# Altium PCB ZynQRF.PcbDoc (part 1 of 2)
Units mm, origin at the board's own origin, x right, y up, seen from the top; angles counter-clockwise.
Board outline 152.4 x 101.6 mm, 6 copper layers (Top Layer, Int1 (GND), Int2 (Sign), Int3 (Sign), Int4 (PWR), Bottom Layer), stack 1.551 mm thick; 211 components, 269 nets, 1177 pads, 225 vias.
Unrouted connection lines stored in the file: 758.
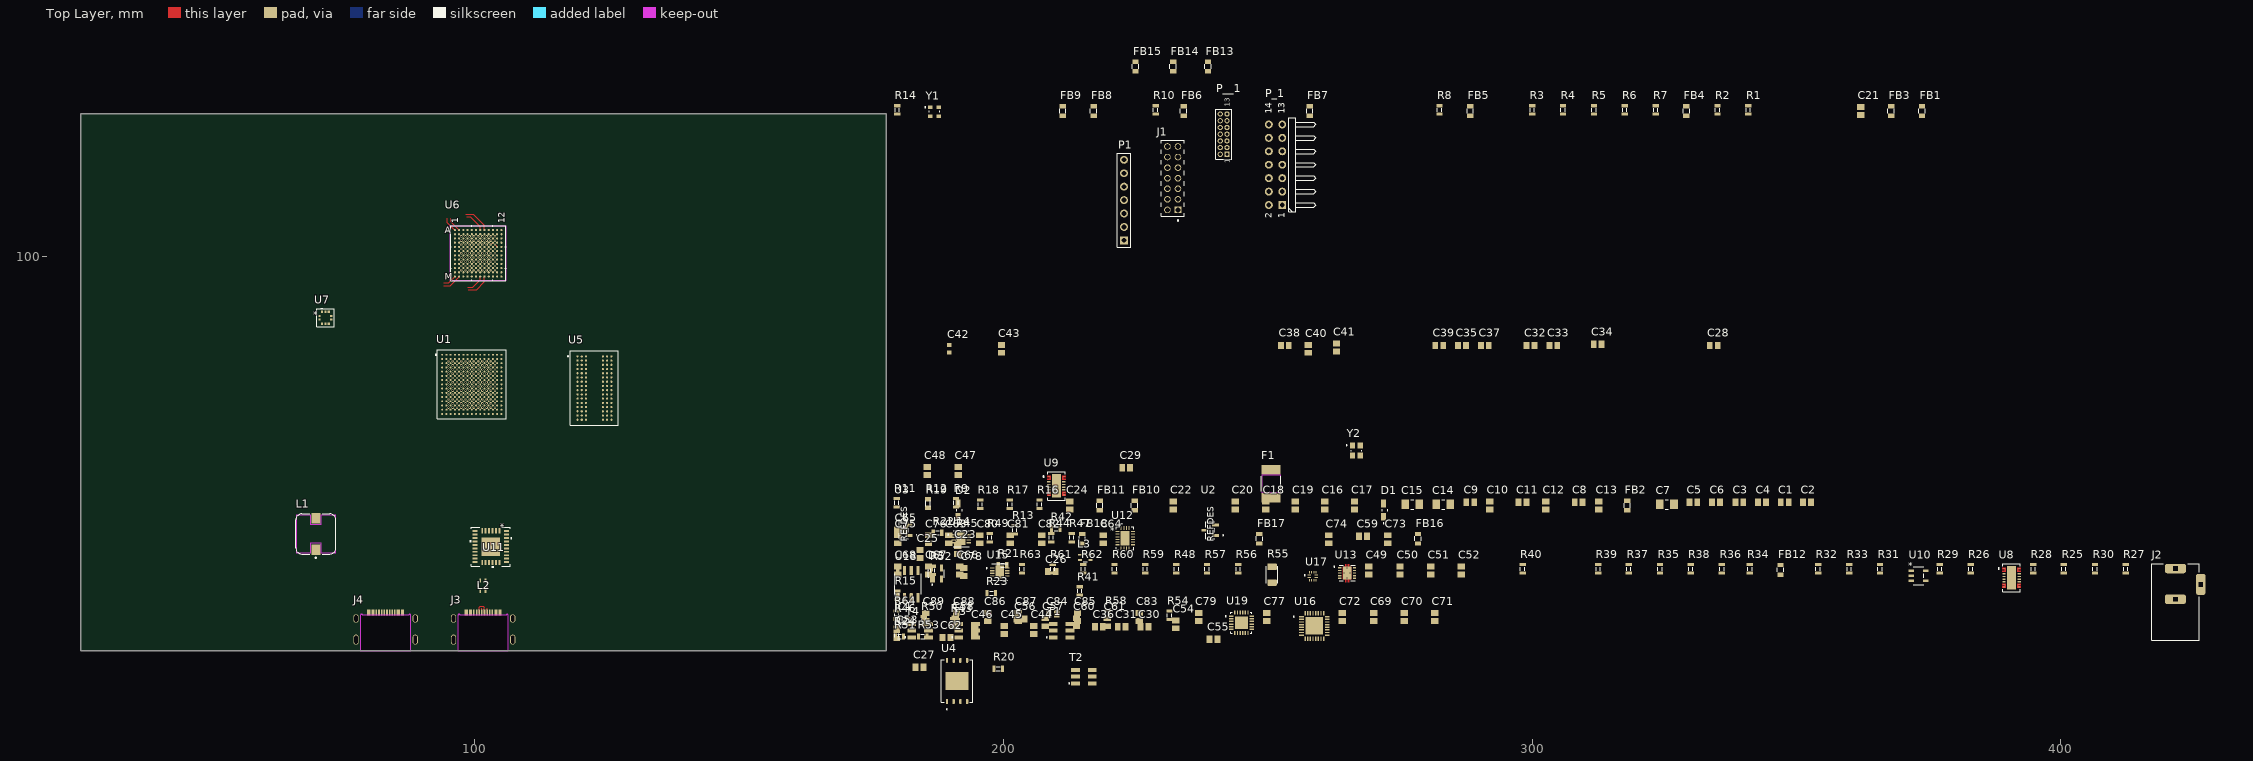
[diagram p0: Top Layer view]
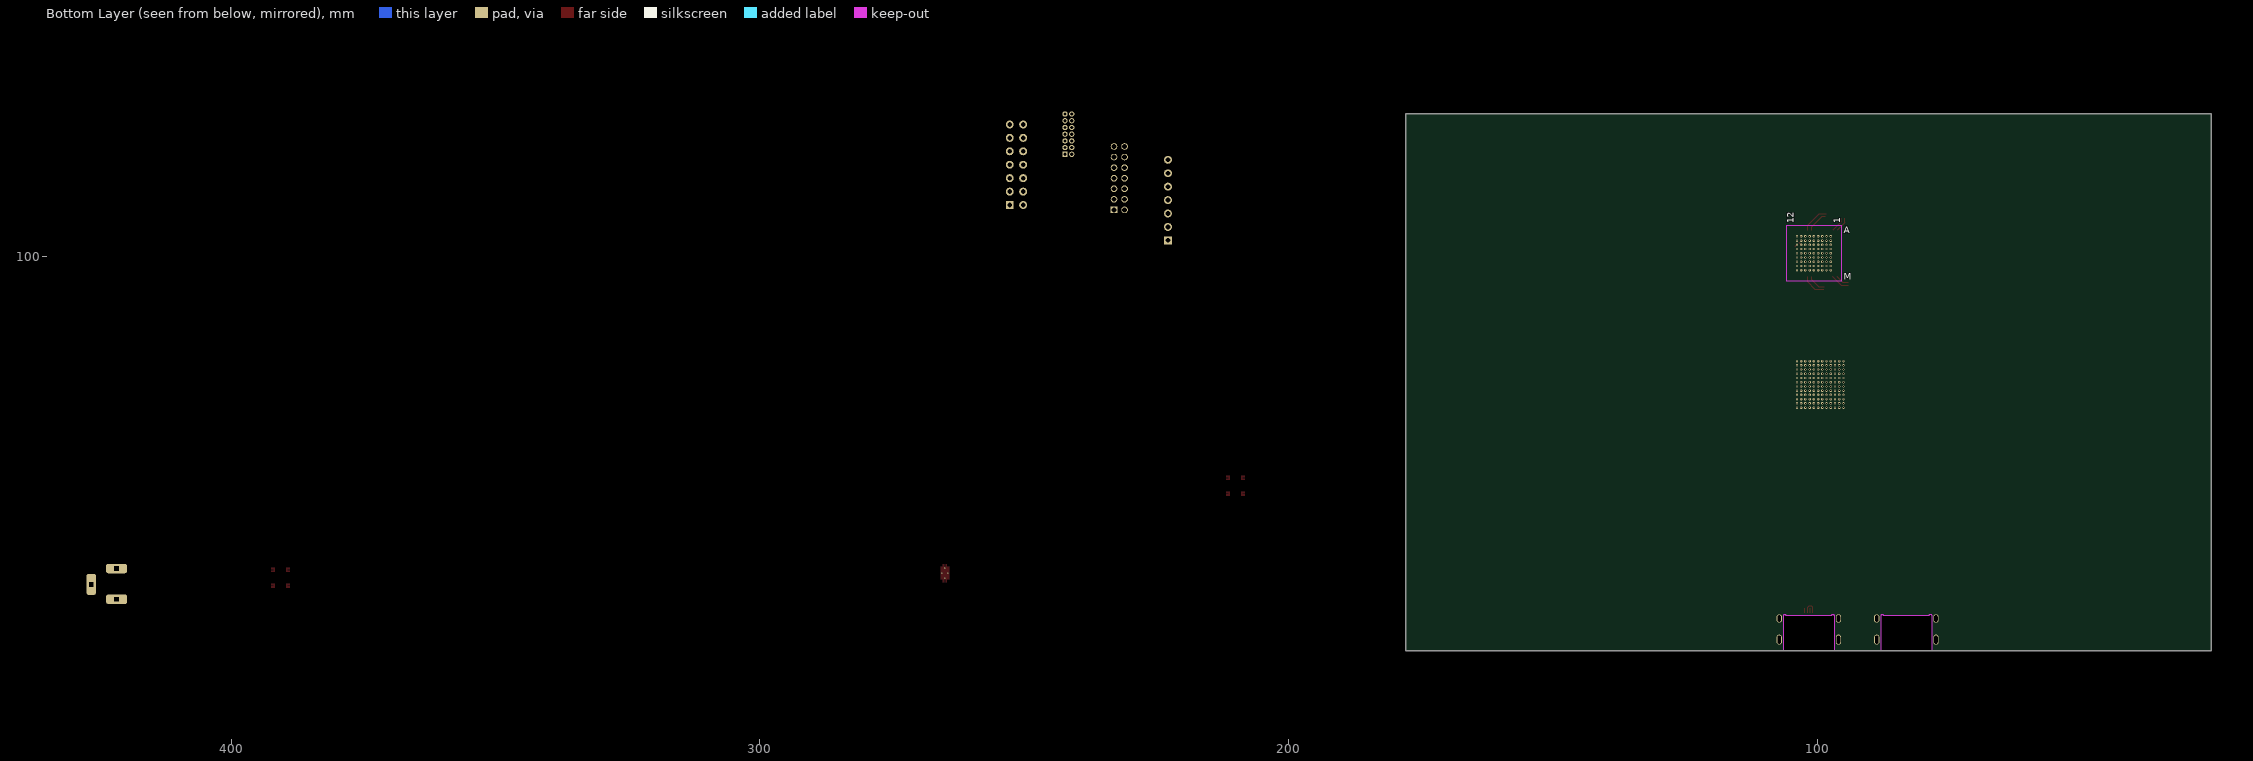
[diagram p1: Bottom Layer view, seen from below]
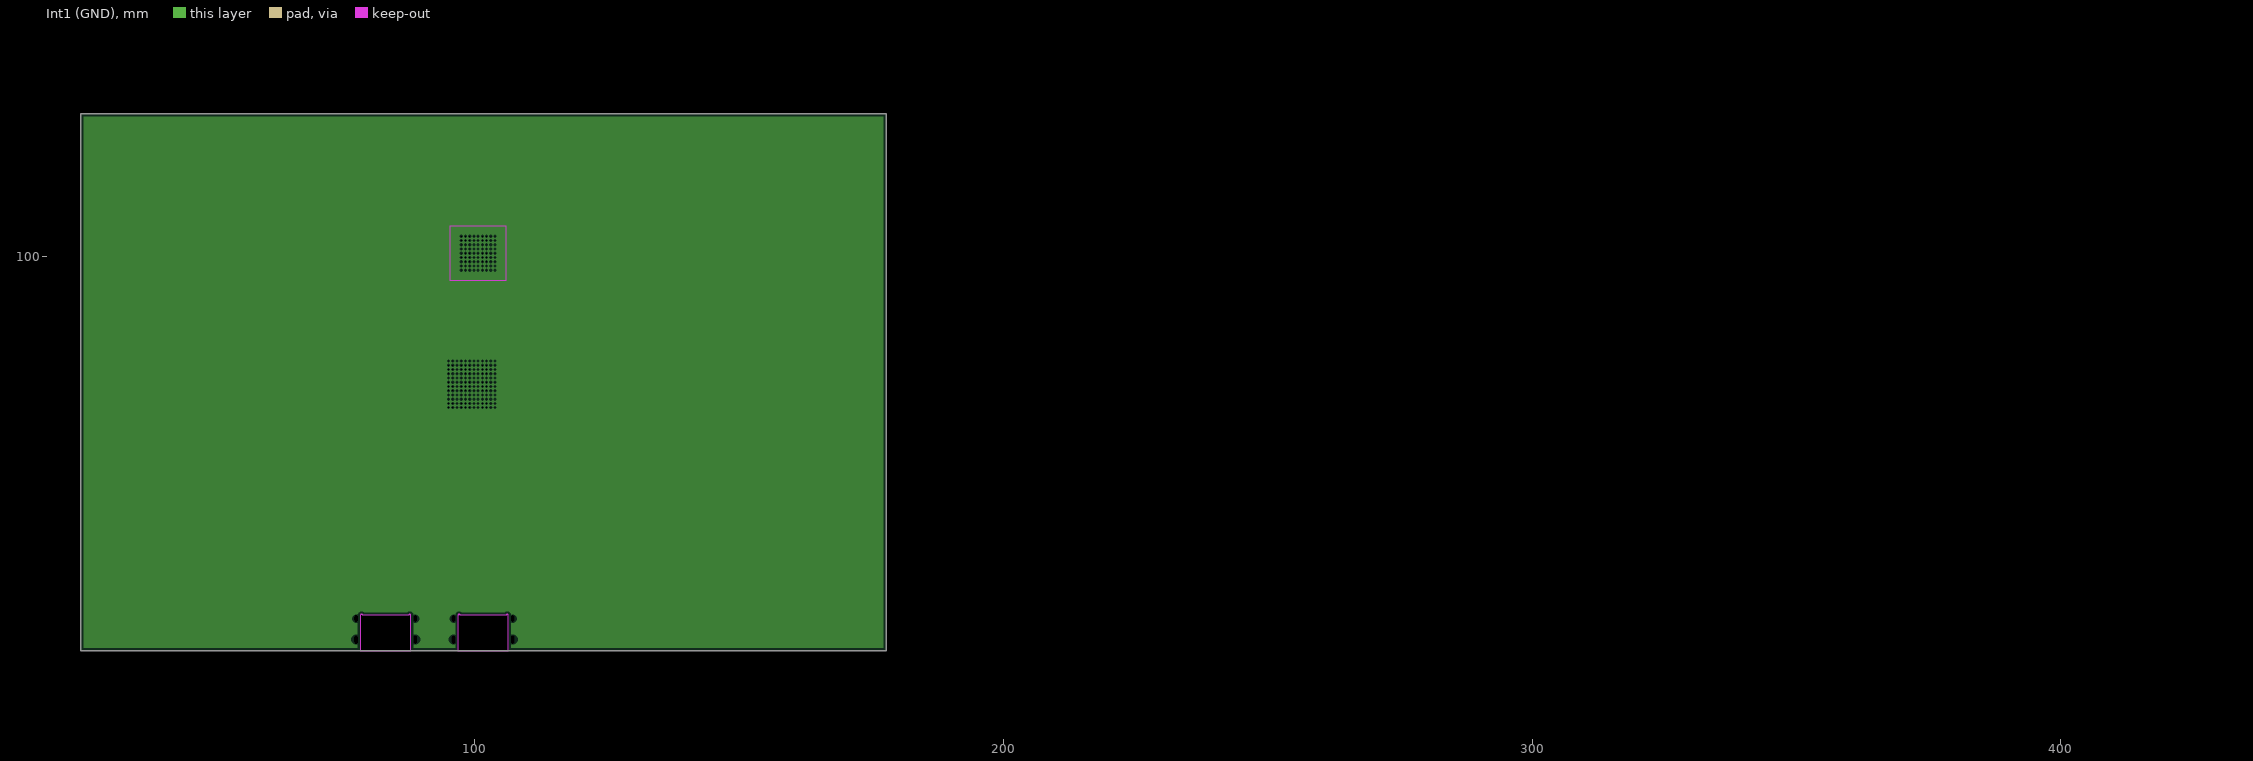
[diagram p2: Int1 (GND), clearances drawn from the general rule]
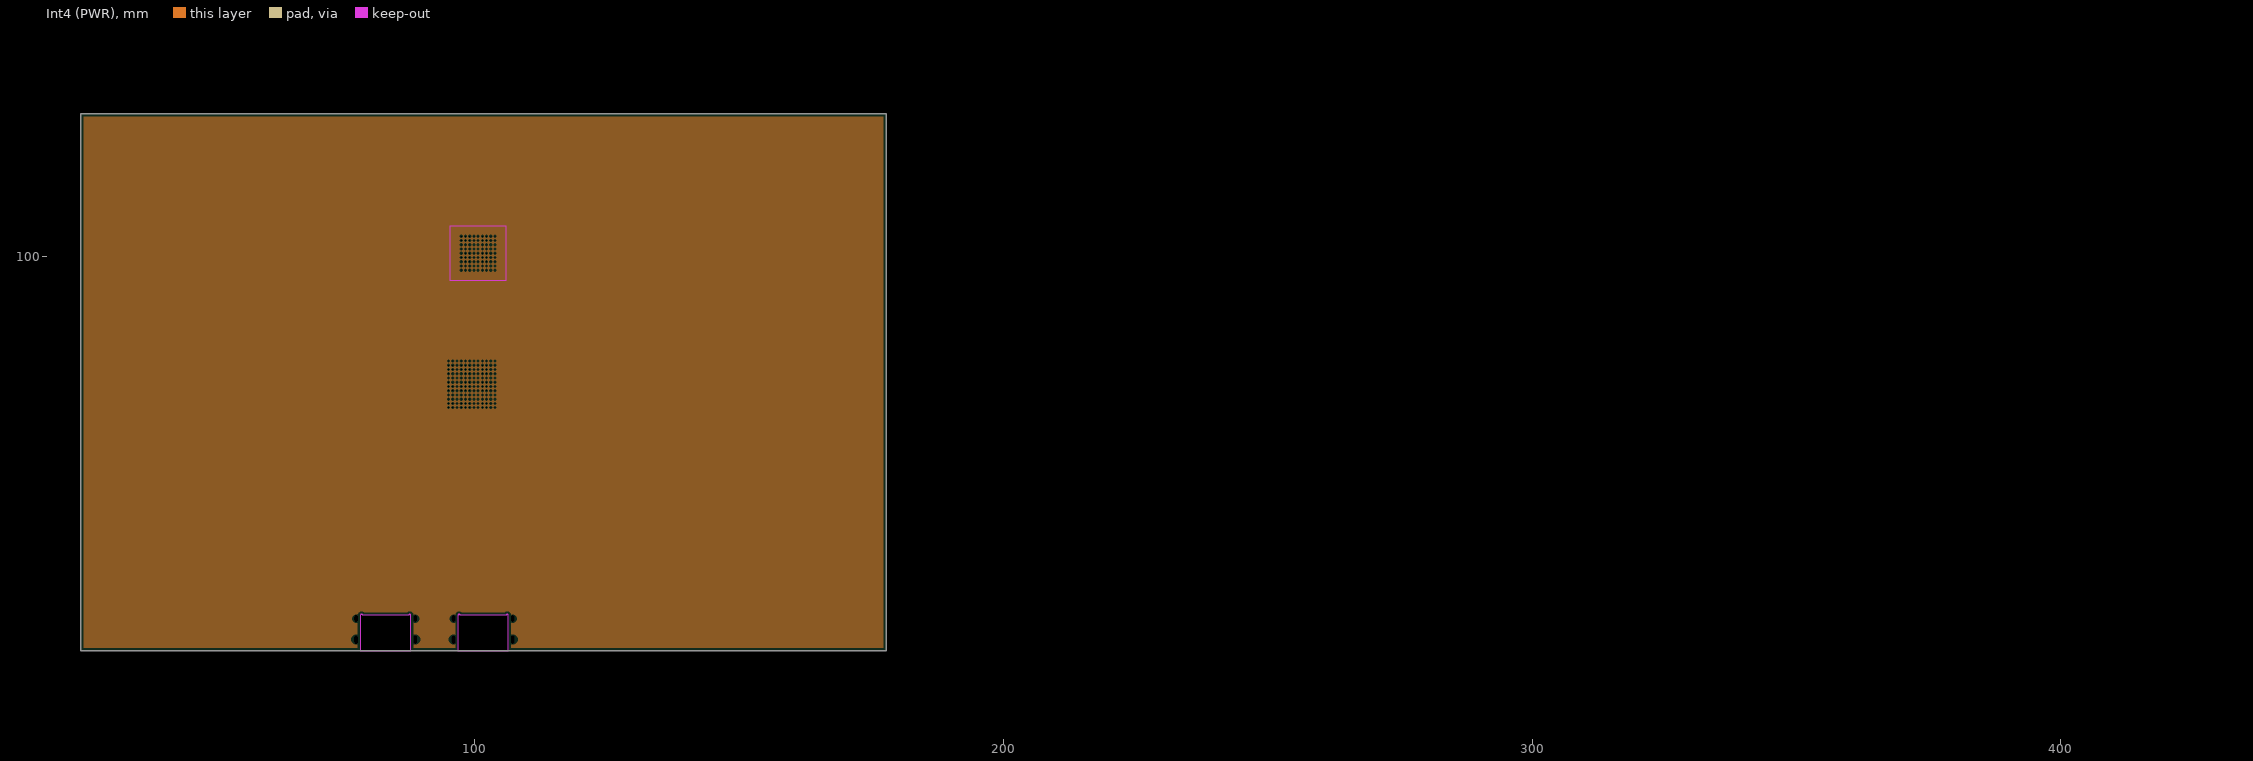
[diagram p3: Int4 (PWR), clearances drawn from the general rule]

## Layer stack, top to bottom
Top Solder: solder mask 0.0254, SM-001, Dk 4
Top Layer: signal copper 0.035
Dielectric 1: prepreg 0.0711, PP-006, Dk 4.1
Dielectric 2: prepreg 0.0711, PP-006, Dk 4.1
Int1 (GND): plane copper 0.035
Dielectric 3: core 0.4572, Core-035, Dk 4.7
Int2 (Sign): signal copper 0.035
Dielectric 4: prepreg 0.0711, PP-006, Dk 4.1
Dielectric 5: prepreg 0.0711, PP-006, Dk 4.1
Int3 (Sign): signal copper 0.035
Dielectric 6: core 0.4572, Core-035, Dk 4.7
Int4 (PWR): plane copper 0.035
Dielectric 7: prepreg 0.0711, PP-006, Dk 4.1
Dielectric 8: prepreg 0.0711, PP-006, Dk 4.1
Bottom Layer: signal copper 0.035
Bottom Solder: solder mask 0.0254, SM-001, Dk 4

## Board outline
25.4,25.4 177.8,25.4 177.8,127 25.4,127

## Design rules (kind name [scope] priority, off if disabled: settings)
Clearance [All] p1: gap=0.1 ignorepadtopadclearanceinfootprint=TRUE
DiffPairsRouting [All] p1: maxlimit=0.254 minlimit=0.1 mostfreqgap=0.15 toplayer_minwidth=0.1 toplayer_maxwidth=0.381 toplayer_prefwidth=0.15 midlayer1_minwidth=0.1 midlayer1_maxwidth=0.381 midlayer1_prefwidth=0.15 midlayer2_minwidth=0.1 midlayer2_maxwidth=0.381 midlayer2_prefwidth=0.15 bottomlayer_minwidth=0.1 bottomlayer_maxwidth=0.381 bottomlayer_prefwidth=0.15 maxuncoupledlength=12.7
MatchedLengths MatchLengths_xSignals_U11_U5 [InxSignalClass('xSignals_U11_U5_MatchLengthsClass')] p1: tolerance=2.54 checknetsindiffpair=FALSE checkdiffpairvsdiffpair=TRUE checkxsignals=TRUE checkothers=TRUE
PlaneClearance [All] p1: clearance=0.203
PlaneConnect [All] p1: planeconnectstyle=Relief reliefexpansion=0.508 reliefentries=4 reliefconductorwidth=0.254 reliefairgap=0.254
PolygonConnect [All] p1: connectstyle=Relief reliefconductorwidth=0.254 reliefentries=4 polygonreliefangle="90 Angle" airgapwidth=0.254
RoomDefinition USB [InComponentClass('USB')] p1: confinementstyle=ConfineIn formatcopy=TRUE lockcomponents=FALSE outline 178.9,26.8 285.499,26.8 285.499,36 178.9,36
RoomDefinition DDR3 [InComponentClass('DDR3')] p2: confinementstyle=ConfineIn formatcopy=TRUE lockcomponents=FALSE outline 268.099,35.6 316.499,35.6 316.499,44.8 268.099,44.8
RoomDefinition ZYNQ [InComponentClass('ZYNQ')] p3: confinementstyle=ConfineIn formatcopy=TRUE lockcomponents=FALSE outline 183.3,27.4 188.8,27.4 188.8,44.5 183.3,44.5
RoomDefinition RF [InComponentClass('RF')] p4: confinementstyle=ConfineIn formatcopy=TRUE lockcomponents=FALSE outline 195.5,28.8 200.4,28.8 200.4,34.6 195.5,34.6
RoomDefinition POWER [InComponentClass('POWER')] p5: confinementstyle=ConfineIn formatcopy=TRUE lockcomponents=FALSE outline 178.9,35.9 210.6,35.9 210.6,44.6 178.9,44.6
RoutingVias FanOut_Vias [InNetClass('All Nets')] p1: holewidth=0.15 width=0.45 viastyle="Through Hole" minholewidth=0.1 minwidth=0.3 maxholewidth=0.2 maxwidth=0.45
RoutingVias Vias_Normales [All] p2: holewidth=0.2 width=1.27 viastyle="Through Hole" minholewidth=0.711 minwidth=1.27 maxholewidth=0.711 maxwidth=1.27
SolderMaskExpansion [All] p1: expansion=0.102 istentingtop=FALSE
Width [All] p1: maxlimit=0.5 minlimit=0.1 preferedwidth=0.15
27 further rules are at their usual default settings.

## Classes and differential pairs
component class USB: C69 C70 C71 C72 C73 C74 C75 C76 C77 C78 C79 C80 C81 C82 C83 C84 C85 C86 C87 C88 C89 D3 FB13 FB14 FB15 FB16 FB17 FB18 IC1 J3 J4 L2 L3 R49 R50 R51 R52 R53 R54 R55 R56 R57 R58 R59 R60 R61 R62 R63 R64 U16 U17 U18 U19 Y2
net class DDR_DQ[15..0]: DDR_DQ0 DDR_DQ1 DDR_DQ2 DDR_DQ3 DDR_DQ4 DDR_DQ5 DDR_DQ6 DDR_DQ7 DDR_DQ8 DDR_DQ9 DDR_DQ10 DDR_DQ11 DDR_DQ12 DDR_DQ13 DDR_DQ14 DDR_DQ15
net class DDR_A[14..0]: DDR_A0 DDR_A1 DDR_A2 DDR_A3 DDR_A4 DDR_A5 DDR_A6 DDR_A7 DDR_A8 DDR_A9 DDR_A10 DDR_A11 DDR_A12 DDR_A13 DDR_A14
component class ZYNQ: C1 C2 C3 C4 C5 C6 C7 C8 C9 C10 C11 C12 C13 C14 C15 C16 C17 C18 C19 C20 C21 C22 C23 C24 D1 D2 D5 D6 FB1 FB2 FB3 FB4 FB5 FB6 FB7 FB8 FB9 FB10 FB11 J1 P1 P_1 P__1 R1 R2 R3 R4 R5 R6 R7 R8 R9 R10 R11 R12 R13 R14 R15 R16 R17 R18 R19 U1 U2 U3 Y1
component class RF: C27 R24 T1 T2 T3 T4 U6
component class POWER: C28 C29 C30 C31 C32 C33 C34 C35 C36 C37 C38 C39 C40 C41 C42 C43 C44 C45 C46 C47 C48 C49 C50 C51 C52 C53 C54 C55 C56 C57 C58 C59 C60 C61 C62 C63 C64 C65 C66 C67 C68 F1 FB12 J2 L1 R25 R26 R27 R28 R29 R30 R31 R32 R33 R34 R35 R36 R37 R38 R39 R40 R41 R42 R43 R44 R45 R46 R47 R48 U7 U8 U9 U10 U11 U12 U13 U14 U15
component class DDR3: C25 C26 R20 R21 R22 R23 U4 U5
differential pair USB_UART: +USB_UART_P -USB_UART_N
differential pair USB_OTG_90_OHM: +USB_OTG_90_OHM_P -USB_OTG_90_OHM_N
differential pair TX_D5: +TX_D5_P -TX_D5_N
differential pair TX_D4: +TX_D4_P -TX_D4_N
differential pair TX_D3: +TX_D3_P -TX_D3_N
differential pair TX_D2: +TX_D2_P -TX_D2_N
differential pair TX_D1: +TX_D1_P -TX_D1_N
differential pair TX_D0: +TX_D0_P -TX_D0_N
differential pair RX_D5: +RX_D5_P -RX_D5_N
differential pair RX_D4: +RX_D4_P -RX_D4_N
differential pair RX_D3: +RX_D3_P -RX_D3_N
differential pair RX_D2: +RX_D2_P -RX_D2_N
differential pair RX_D1: +RX_D1_P -RX_D1_N
differential pair RX_D0: +RX_D0_P -RX_D0_N

## Components (designator, comment, footprint, x,y, rotation, side; value= is the part's Value field where it differs from the comment)
C1 "Cap Pol3" C0805 347.799,53.5 r0 top value=47uF
C2 "Cap Pol3" C0805 351.999,53.5 r0 top value=4.7uF
C3 "Cap Pol3" C0805 339.199,53.5 r0 top value=47uF
C4 "Cap Pol3" C0805 343.499,53.5 r0 top value=0.47uF
C5 "Cap Pol3" C0805 330.499,53.5 r0 top value=4.7uF
C6 "Cap Pol3" C0805 334.799,53.5 r0 top value=0.47uF
C7 "C3216X5R1A107M160AC" CAPC3216X190N 325.499,53.1 r0 top
C8 "Cap Pol3" C0805 308.799,53.5 r0 top value=47uF
C9 "Cap Pol3" C0805 288.299,53.5 r0 top value=4.7uF
C10 "Cap Pol3" C0805 291.999,52.9 r90 top value=0.47uF
C11 "Cap Pol3" C0805 298.199,53.5 r0 top value=0.47uF
C12 "Cap Pol3" C0805 302.599,52.9 r90 top value=47uF
C13 "Cap Pol3" C0805 312.599,52.9 r90 top value=0.47uF
C14 "C3216X5R1A107M160AC" CAPC3216X190N 283.199,53.1 r0 top
C15 "C3216X5R1A107M160AC" CAPC3216X190N 277.299,53.1 r0 top
C16 "Cap Pol3" C0805 260.799,52.9 r90 top value=100nF
C17 "Cap Pol3" C0805 266.399,52.9 r90 top value=0.47uF
C18 "Cap Pol3" C0805 249.6,52.9 r90 top value=47uF
C19 "Cap Pol3" C0805 255.199,52.9 r90 top value=0.47uF
C20 "Cap Pol3" C0805 243.8,52.9 r90 top value=4.7uF
C21 "Cap Pol3" C0805 362.204,127.508 r90 top value=1uF
C22 "Cap Pol3" C0805 232.1,52.9 r90 top value=47uF
C23 "Cap Pol3" C0805 191.3,44.45 r90 top value=100nF
C24 "Cap Pol3" C0805 212.5,52.9 r90 top value=100nF
C25 "Cap Pol3" C0805 184.2,43.7 r90 top value=100nF
C26 "Cap Pol3" C0805 209.115,40.386 r0 top value=100nF
C27 "Cap Pol3" C0805 184.1,22.3 r0 top value=1nF
C28 "Cap Pol3" C0805 334.364,83.158 r0 top value=10uF
C29 "Cap Pol3" C0805 223.2,60 r0 top value=10uF
C30 "Pol3" C0805 226.668,29.945 r0 top value=22uF
C31 "Cap Pol3" C0805 222.35,29.945 r0 top value=10uF
C32 "Cap Pol3" C0805 299.693,83.158 r0 top value=2.2uF
C33 "Cap Pol3" C0805 304.011,83.158 r0 top value=100nF
C34 "Cap Pol3" C0805 312.393,83.412 r0 top value=2.2uF
C35 "Cap Pol3" C0805 286.739,83.158 r0 top value=47uF
C36 "Cap Pol3" C0805 218.032,29.945 r0 top value=100nF
C37 "Cap Pol3" C0805 291.057,83.158 r0 top value=47uF
C38 "Cap Pol3" C0805 253.211,83.158 r0 top value=47uF
C39 "Cap Pol3" C0805 282.421,83.158 r0 top value=2.2uF
C40 "Cap Pol3" C0805 257.656,82.523 r90 top value=2.2uF
C41 "Pol3" C0805 262.99,82.777 r90 top value=22uF
C42 "" 1608[0603] 189.711,82.523 r90 top value=1uF
C43 "Cap Pol3" C0805 199.617,82.523 r90 top value=1nF
C44 "Pol3" C0805 205.713,29.31 r90 top value=22uF
C45 "Pol3" C0805 200.125,29.31 r90 top value=22uF
C46 "Pol3" C0805 194.537,29.31 r90 top value=22uF
C47 "Pol3" C0805 191.4,59.4 r90 top value=22uF
C48 "Pol3" C0805 185.6,59.4 r90 top value=22uF
C49 "Pol3" C0805 269.099,40.6 r90 top value=22uF
C50 "Pol3" C0805 274.999,40.6 r90 top value=22uF
C51 "Cap Pol3" C0805 280.799,40.6 r90 top value=47uF
C52 "Cap Pol3" C0805 286.599,40.6 r90 top value=47uF
C53 "" 1608[0603] 180,28.5 r90 top value=10nF
C54 "Cap Pol3" C0805 232.6,30.4 r90 top value=1uF
C55 "Cap Pol3" C0805 239.7,27.6 r0 top value=100nF
C56 "Cap Pol3" C0805 203.2,31.4 r0 top value=10nF
C57 "Cap Pol3" C0805 207.9,30.8 r90 top value=10uF
C58 "Cap Pol3" C0805 190.9,30.8 r90 top value=10uF
C59 "Cap Pol3" C0805 267.999,47.1 r0 top value=10uF
C60 "Pol3" C0805 213.8,30.8 r90 top value=4.7uF
C61 "Pol3" C0805 219.6,30.8 r90 top value=4.7uF
C62 "Cap Pol3" C0805 189.2,27.9 r0 top value=1nF
C63 "Pol3" C0805 189.6,46.5 r90 top value=1nF
C64 "Pol3" C0805 218.9,46.5 r90 top value=10uF
C65 "Cap Pol3" C0805 180.6,48.2 r0 top value=1nF
C66 "Pol3" C0805 191.7,40.6 r90 top value=4.7uF
C67 "Pol3" C0805 185.8,40.6 r90 top value=4.7uF
C68 "Pol3" C0805 180,40.6 r90 top value=1nF
C69 "Cap Pol3" C0805 269.999,31.8 r90 top value=1uF
C70 "Cap Pol3" C0805 275.799,31.8 r90 top value=1uF
C71 "Cap Pol3" C0805 281.599,31.8 r90 top value=1uF
C72 "Cap Pol3" C0805 264.099,31.8 r90 top value=100nF
C73 "Cap Pol3" C0805 272.699,46.5 r90 top value=2.2uF
C74 "Cap Pol3" C0805 261.499,46.5 r90 top value=100nF
C75 "Cap Pol3" C0805 180,46.5 r90 top value=47uF
C76 "Cap Pol3" C0805 185.8,46.5 r90 top value=100nF
C77 "Cap Pol3" C0805 249.8,31.8 r90 top value=100nF
C78 "Cap Pol3" C0805 192.5,40.3 r90 top value=100nF
C79 "Cap Pol3" C0805 236.9,31.8 r90 top value=4.7uF
C80 "Cap Pol3" C0805 195.5,46.5 r90 top value=100nF
C81 "Cap Pol3" C0805 201.3,46.5 r90 top value=100nF
C82 "Cap Pol3" C0805 207.2,46.5 r90 top value=4.7uF
C83 "Cap Pol3" C0805 225.7,31.8 r90 top value=10nF
C84 "Cap Pol3" C0805 209.3,32.4 r0 top value=47pf
C85 "Cap Pol3" C0805 214,31.8 r90 top value=47pf
C86 "Cap Pol3" C0805 197,31.8 r90 top value=100nF
C87 "Cap Pol3" C0805 202.8,31.8 r90 top value=100nF
C88 "Cap Pol3" C0805 191.1,31.8 r90 top value=100nF
C89 "Cap Pol3" C0805 185.3,31.8 r90 top value=100nF
D1 "LTST-S220TBKT" LED_LTST-S220TBKT 271.899,52 r90 top
D2 "LTST-S220TBKT" LED_LTST-S220TBKT 191.4,52 r90 top
D3 "SP0503BAHTG" SOT143 187.3,40 r0 top
F1 "0ZCG0260BF2B" 0ZCG_BEL 250.599,57 r90 top
FB1 "FERRITA" 0805R 373.761,126.619 r90 top
FB2 "FERRITA" 0805R 317.999,52 r90 top
FB3 "FERRITA" 0805R 367.919,126.619 r90 top
FB4 "FERRITA" 0805R 329.184,126.619 r90 top
FB5 "FERRITA" 0805R 288.29,126.619 r90 top
FB6 "FERRITA" 0805R 234.061,126.619 r90 top
FB7 "FERRITA" 0805R 257.937,126.619 r90 top
FB8 "FERRITA" 0805R 217.043,126.619 r90 top
FB9 "FERRITA" 0805R 211.201,126.619 r90 top
FB10 "FERRITA" 0805R 224.8,52 r90 top
FB11 "FERRITA" 0805R 218.2,52 r90 top
FB12 "FERRITA" 0805R 346.999,39.8 r90 top
FB13 "FERRITA" 0805R 238.689,135.019 r90 top
FB14 "FERRITA" 0805R 232.085,135.019 r90 top
FB15 "FERRITA" 0805R 224.973,135.019 r90 top
FB16 "FERRITA" 0805R 278.399,45.7 r90 top
FB17 "FERRITA" 0805R 248.4,45.7 r90 top
FB18 "FERRITA" 0805R 214.9,45.7 r90 top
IC1 "74LVC1G126GW,125" SOT65P212X110-5N 180.9,30.9 r0 top
J1 "MTMM-107-03-G-D-190" SAMTEC_MTMM-107-03-G-D-190 232,114.8 r90 top
J2 "694108301002" 694108301002 421.699,34.6 r0 top
J3 "UJ20-C-H-C-MSMT-TR" CUI_UJ20-C-H-C-MSMT-TR 101.55,27.5 r0 top
J4 "UJ20-C-H-C-MSMT-TR" CUI_UJ20-C-H-C-MSMT-TR 83.1,27.5 r0 top
L1 "4.7uH, 2.9A" WE-PD_7332R 69.9,47.5 r180 top
L2 "DLW21HN900SQ2L" IND_DLW21H_0805_MUR 101.5,37.7 r90 top
L3 "DLW21HN900SQ2L" IND_DLW21H_0805_MUR 215.448,43.071 r0 top
P1 "Header 7" HDR1X7 222.8,103.04 r90 top
P_1 "Header 7X2H" HDR2X7H 252.73,109.728 r90 top
P__1 "MHDR2X7" MHDR2X7 242.27,119.32 r90 top
R1 "Res1" 0603 341.503,126.619 r90 top value="470R, 5%"
R2 "Res1" 0603 335.661,126.619 r90 top value="4k7, 5%"
R3 "Res1" 0603 300.609,126.619 r90 top value=10K
R4 "Res1" 0603 306.451,126.619 r90 top value=10K
R5 "Res1" 0603 312.293,126.619 r90 top value=10K
R6 "Res1" 0603 318.135,126.619 r90 top value=10K
R7 "Res1" 0603 323.977,126.619 r90 top value=10K
R8 "Res1" 0603 283.083,126.619 r90 top value="4k7, 5%"
R9 "Res1" 0603 191.6,52.3 r90 top value="4K7, 5%"
R10 "Res1" 0603 229.362,126.619 r90 top value=0R
R11 "Res1" 0603 180.4,52.3 r90 top value="20K, 5%"
R12 "Res1" 0603 186.3,52.3 r90 top value="4K7, 5%"
R13 "Res1" 0603 202.7,47.2 r90 top value="20K, 5%"
R14 "Res1" 0603 180.467,126.619 r90 top value="10K, 5%"
R15 "Res1" 0603 180.467,34.798 r90 top value=39R
R16 "Res1" 0603 207.4,52 r90 top value="20K, 5%"
R17 "Res1" 0603 201.8,52 r90 top value="20K, 5%"
R18 "Res1" 0603 196.2,52 r90 top value="10K, 5%"
R19 "Res1" 0603 186.3,52 r90 top value="470R, 5%"
R20 "Res1" 0603 197.9,21.4 r0 top value=240R
R21 "Res1" 0603 198.7,41 r0 top value=1K
R22 "Res1" 0603 186.4,47.1 r0 top value=240R
R23 "Res1" 0603 196.6,35.7 r0 top value=240R
R24 "Res1" 0603 180.4,27.2 r90 top value=14k3
R25 "Res1" 0603 401.199,39.8 r90 top value=10K
R26 "Res1" 0603 383.599,39.8 r90 top value=470R
R27 "Res1" 0603 412.899,39.8 r90 top value=170R
R28 "Res1" 0603 395.399,39.8 r90 top value="24k9 5%"
R29 "Res1" 0603 377.699,39.8 r90 top value=27k4
R30 "Res1" 0603 407.099,39.8 r90 top value=27k4
R31 "Res1" 0603 366.399,39.8 r90 top value=47k
R32 "Res1" 0603 354.699,39.8 r90 top value=100R
R33 "Res1" 0603 360.599,39.8 r90 top value=100R
R34 "Res1" 0603 341.799,39.8 r90 top value=8k87
R35 "Res1" 0603 324.799,39.8 r90 top value=470R
R36 "Res1" 0603 336.499,39.8 r90 top value=470R
R37 "Res1" 0603 318.899,39.8 r90 top value=8.06k
R38 "Res1" 0603 330.599,39.8 r90 top value=8.06k
R39 "Res1" 0603 313.099,39.8 r90 top value=100k
R40 "Res1" 0603 298.799,39.8 r90 top value=20k
R41 "Res1" 0603 215,35.6 r90 top value=7k
R42 "Res1" 0603 208.8,47.9 r0 top value=120k
R43 "Res1" 0603 191.1,29.6 r90 top value=25k
R44 "Res1" 0603 209.6,45.7 r90 top value="56K 1%"
R45 "Res1" 0603 192.1,45.7 r90 top value=10K
R46 "Res1" 0603 180.4,29.6 r90 top value="100K 1%"
R47 "Res1" 0603 213.5,45.7 r90 top value=10K1%
R48 "Res1" 0603 233.3,39.8 r90 top value="10k 1%"
R49 "Res1" 0603 198,45.7 r90 top value=200k
R50 "Res1" 0603 185.5,30 r90 top value=900K
R51 "Res1" 0603 179.2,27.5 r0 top value=8.06k
R52 "Res1" 0603 187.2,39.5 r90 top value=39R
R53 "Res1" 0603 183.6,27.5 r0 top value=1K
R54 "Res1" 0603 232,31 r90 top value=22k1
R55 "0ZCJ0050AF2E" RESC3216X125N 250.799,39.8 r90 top
R56 "Res1" 0603 245,39.8 r90 top value=39R
R57 "Res1" 0603 239.1,39.8 r90 top value=39R
R58 "Res1" 0603 220.3,31 r90 top value=47k5
R59 "Res1" 0603 227.4,39.8 r90 top value=5.1k
R60 "Res1" 0603 221.6,39.8 r90 top value=10k
R61 "Res1" 0603 209.9,39.8 r90 top value=5.1k
R62 "Res1" 0603 215.7,39.8 r90 top value=10k
R63 "Res1" 0603 204.1,39.8 r90 top value=10k
R64 "Res1" 0603 180.4,31 r90 top value=39R
T1 "TCM1-63AX+" XFMR_TCM1-63AX+ 211,29.2 r90 top
T2 "TCM1-63AX+" XFMR_TCM1-63AX+ 215.2,20.5 r90 top
T3 "TCM1-63AX+" XFMR_TCM1-63AX+ 193.1,29.2 r90 top
T4 "TCM1-63AX+" XFMR_TCM1-63AX+ 184.2,29.2 r90 top
U1 "XC7Z010-1CLG225I" BGA225C80P15X15_1300X1300X150N 99.4,75.8 r0 top
U2 "BSS138LT3G" SOT-23-3_1P4X3P040_ONS 239.1,48.2 r90 top
U3 "BSS138LT3G" SOT-23-3_1P4X3P040_ONS 181.1,48.2 r90 top
U4 "W25Q256JVEIQ_TR" SON127P600X800X80-9N 191.2,19.7 r90 top
U5 "MT41K256M16HA-125:E" BGA96C80P6X16_900X1400X120N 122.6,75.1 r0 top
U6 "AD9363ABCZ" BC-144-7_ADI 100.6,100.6 r0 top
U7 "MPM3632SGPQ-P" EC_LGA-10_MNP 71.7,88.4 r0 top
U8 "LTC4415EDHCPBF" 05-08-1872_ADI 390.699,39.2 r0 top
U9 "LTC4415EDHCPBF" 05-08-1872_ADI 210,56.6 r0 top
U10 "AP22802AW5-7" SOT25_DIO 373.099,39.6 r0 top
U11 "MPM54304GMN-0000" LGA7x7x2_MNP 103,45.1 r270 top
U12 "TPS259401AQRVCRQ1" WQFN_3QRVCRQ1_TEX 223,46.7 r0 top
U13 "TPS51200DRCT" VREG_V62/16624-01YE 264.999,40.1 r0 top
U14 "ADM7170ACPZ-1.3-R7" SON50P300X300X80-9N 192,46.6 r0 top
U15 "ADM7170ACPZ-1.3-R7" SON50P300X300X80-9N 199.3,40.3 r0 top
U16 "USB3320C-EZK-TR" QFN50P500X500X100-33N 258.799,30.1 r0 top
U17 "TUSB322I" IC_TUSB320IRWBR 258.499,39.5 r0 top
U18 "TJA1050T/CM,118" SOIC127P600X175-8N 181.9,38 r90 top
U19 "CP2102N-A02-GQFN24R" QFN50P400X400X80-25N 245,30.7 r0 top
Y1 "ASDMB-33.000MHZ-LY-T" XTAL_ASDMB-33.000MHZ-LY-T 186.944,127.381 r0 top
Y2 "SIT1602BI-11-18E-24.000000G" OSC_SIT1602BI-11-18E-24.000000G 266.756,63.264 r0 top

## Footprints (in the part's own frame and the unit in brackets; to place one, negate y for a bottom-side part, rotate by r counter-clockwise, add the part's x,y. Pads: shape width x height; smd on the part's side, far side on the other; paste and mask are expansions set on the pad)
0ZCG_BEL [mil]
  rect 70x138 smd paste+0 mask+0: 1(-103,0) 2(103,0)
  Top Layer keep-out region: -66,-67 -66,67 66,67 66,-67
  silkscreen extent -55,-72 55,72, body extent -93,-67 93,67, height 61
05-08-1872_ADI [mm]
  rect 0.127x0.127 smd paste-0.064 mask-0.064: 1(-1.425,1.75) 2(-1.425,1.25) 7(-1.425,-1.25) 8(-1.425,-1.75) 9(1.425,-1.75) 10(1.425,-1.25) 15(1.425,1.25) 16(1.425,1.75)
  rect 0.65x0.25 smd paste+0 mask+0: 3(-1.425,0.75) 4(-1.425,0.25) 5(-1.425,-0.25) 6(-1.425,-0.75) 11(1.425,-0.75) 12(1.425,-0.25) 13(1.425,0.25) 14(1.425,0.75)
  rect 1.65x4.4 smd paste-0.825 mask+0: 17(0,0)
  Top Layer region: 1.29,-1.375 1.75,-1.375 1.75,-1.125 1.1,-1.125 1.1,-1.875 1.75,-1.875 1.75,-1.625 1.29,-1.625
  Top Layer region: -1.29,-1.625 -1.75,-1.625 -1.75,-1.875 -1.1,-1.875 -1.1,-1.125 -1.75,-1.125 -1.75,-1.375 -1.29,-1.375
  Top Layer region: -1.29,1.375 -1.75,1.375 -1.75,1.125 -1.1,1.125 -1.1,1.875 -1.75,1.875 -1.75,1.625 -1.29,1.625
  Top Layer region: 1.29,1.625 1.75,1.625 1.75,1.875 1.1,1.875 1.1,1.125 1.75,1.125 1.75,1.375 1.29,1.375
  Top Layer region: 0,-2.2 0,-2.2 0,-2.2 0,-2.2 0,-2.2 0,-2.2 0,-2.2 0,-2.2
  Top Layer region: 0,2.2 0,2.2 0,2.2 0,2.2 0,2.2 0,2.2 0,2.2 0,2.2
  silkscreen extent -2.55,-2.68 1.68,2.68
0603 [mm]
  rect 0.6x1.2 smd: 1(0.3,0.6) 2(1.9,0.6)
  silkscreen extent 0.76,0.2 1.44,1
0805R [mm] "footprint 0805"
  rect 0.8x1.2 smd: 1(0,0) 2(1.8,0)
  silkscreen extent 0.5,-0.6 1.33,0.6, body extent -0.1,-0.6 1.9,0.6, height 1.2
1608[0603] [mm] "Chip Capacitor, Body 1.6x0.8mm, IPC High Density"
  rect 0.8x0.9 smd: 1(-0.7,0) 2(0.7,0)
  body extent -0.87,-0.48 0.87,0.48, height 1.3
694108301002 [mm] "DC Power Jack Right Angled(6.4)"
  rrect50% 4x1.8 hole 0.8 square: 1(0,6.35) 2(0,0.55)
  rrect50% 1.8x4 hole 0.8 square: 3(4.8,3.35)
  silkscreen extent -4.5,-7.25 4.5,7.25, body extent -4.5,-7.25 5,7.25, height 10.75
BC-144-7_ADI [mm]
  round 0.406 smd paste+0 mask+0: A1(-4.4,4.4) A2(-3.6,4.4) A3(-2.8,4.4) A4(-2,4.4) A5(-1.2,4.4) A6(-0.4,4.4) A7(0.4,4.4) A8(1.2,4.4) A9(2,4.4) A10(2.8,4.4) A11(3.6,4.4) A12(4.4,4.4) B1(-4.4,3.6) B2(-3.6,3.6) B3(-2.8,3.6) B4(-2,3.6) B5(-1.2,3.6) B6(-0.4,3.6) B7(0.4,3.6) B8(1.2,3.6) B9(2,3.6) B10(2.8,3.6) B11(3.6,3.6) B12(4.4,3.6) C1(-4.4,2.8) C2(-3.6,2.8) C3(-2.8,2.8) C4(-2,2.8) C5(-1.2,2.8) C6(-0.4,2.8) C7(0.4,2.8) C8(1.2,2.8) C9(2,2.8) C10(2.8,2.8) C11(3.6,2.8) C12(4.4,2.8) D1(-4.4,2) D2(-3.6,2) D3(-2.8,2) D4(-2,2) D5(-1.2,2) D6(-0.4,2) D7(0.4,2) D8(1.2,2) D9(2,2) D10(2.8,2) D11(3.6,2) D12(4.4,2) E1(-4.4,1.2) E2(-3.6,1.2) E3(-2.8,1.2) E4(-2,1.2) E5(-1.2,1.2) E6(-0.4,1.2) E7(0.4,1.2) E8(1.2,1.2) E9(2,1.2) E10(2.8,1.2) E11(3.6,1.2) E12(4.4,1.2) F1(-4.4,0.4) F2(-3.6,0.4) F3(-2.8,0.4) F4(-2,0.4) F5(-1.2,0.4) F6(-0.4,0.4) F7(0.4,0.4) F8(1.2,0.4) F9(2,0.4) F10(2.8,0.4) F11(3.6,0.4) F12(4.4,0.4) G1(-4.4,-0.4) G2(-3.6,-0.4) G3(-2.8,-0.4) G4(-2,-0.4) G5(-1.2,-0.4) G6(-0.4,-0.4) G7(0.4,-0.4) G8(1.2,-0.4) G9(2,-0.4) G10(2.8,-0.4) G11(3.6,-0.4) G12(4.4,-0.4) H1(-4.4,-1.2) H2(-3.6,-1.2) H3(-2.8,-1.2) H4(-2,-1.2) H5(-1.2,-1.2) H6(-0.4,-1.2) H7(0.4,-1.2) H8(1.2,-1.2) H9(2,-1.2) H10(2.8,-1.2) H11(3.6,-1.2) H12(4.4,-1.2) J1(-4.4,-2) J2(-3.6,-2) J3(-2.8,-2) J4(-2,-2) J5(-1.2,-2) J6(-0.4,-2) J7(0.4,-2) J8(1.2,-2) J9(2,-2) J10(2.8,-2) J11(3.6,-2) J12(4.4,-2) K1(-4.4,-2.8) K2(-3.6,-2.8) K3(-2.8,-2.8) K4(-2,-2.8) K5(-1.2,-2.8) K6(-0.4,-2.8) K7(0.4,-2.8) K8(1.2,-2.8) K9(2,-2.8) K10(2.8,-2.8) K11(3.6,-2.8) K12(4.4,-2.8) L1(-4.4,-3.6) L2(-3.6,-3.6) L3(-2.8,-3.6) L4(-2,-3.6) L5(-1.2,-3.6) L6(-0.4,-3.6) L7(0.4,-3.6) L8(1.2,-3.6) L9(2,-3.6) L10(2.8,-3.6) L11(3.6,-3.6) L12(4.4,-3.6) M1(-4.4,-4.4) M2(-3.6,-4.4) M3(-2.8,-4.4) M4(-2,-4.4) M5(-1.2,-4.4) M6(-0.4,-4.4) M7(0.4,-4.4) M8(1.2,-4.4) M9(2,-4.4) M10(2.8,-4.4) M11(3.6,-4.4) M12(4.4,-4.4)
  Keep-Out Layer region: -5.245,-5.245 -5.245,5.245 5.245,5.245 5.245,-5.245
  silkscreen extent -5.31,-5.31 5.31,5.31, body extent -5.05,-5.05 5.05,5.05, height 1.7
BGA96C80P6X16_900X1400X120N [mm]
  round 0.41 smd: A1(-3.2,6) A2(-2.4,6) A3(-1.6,6) A7(1.6,6) A8(2.4,6) A9(3.2,6) B1(-3.2,5.2) B2(-2.4,5.2) B3(-1.6,5.2) B7(1.6,5.2) B8(2.4,5.2) B9(3.2,5.2) C1(-3.2,4.4) C2(-2.4,4.4) C3(-1.6,4.4) C7(1.6,4.4) C8(2.4,4.4) C9(3.2,4.4) D1(-3.2,3.6) D2(-2.4,3.6) D3(-1.6,3.6) D7(1.6,3.6) D8(2.4,3.6) D9(3.2,3.6) E1(-3.2,2.8) E2(-2.4,2.8) E3(-1.6,2.8) E7(1.6,2.8) E8(2.4,2.8) E9(3.2,2.8) F1(-3.2,2) F2(-2.4,2) F3(-1.6,2) F7(1.6,2) F8(2.4,2) F9(3.2,2) G1(-3.2,1.2) G2(-2.4,1.2) G3(-1.6,1.2) G7(1.6,1.2) G8(2.4,1.2) G9(3.2,1.2) H1(-3.2,0.4) H2(-2.4,0.4) H3(-1.6,0.4) H7(1.6,0.4) H8(2.4,0.4) H9(3.2,0.4) J1(-3.2,-0.4) J2(-2.4,-0.4) J3(-1.6,-0.4) J7(1.6,-0.4) J8(2.4,-0.4) J9(3.2,-0.4) K1(-3.2,-1.2) K2(-2.4,-1.2) K3(-1.6,-1.2) K7(1.6,-1.2) K8(2.4,-1.2) K9(3.2,-1.2) L1(-3.2,-2) L2(-2.4,-2) L3(-1.6,-2) L7(1.6,-2) L8(2.4,-2) L9(3.2,-2) M1(-3.2,-2.8) M2(-2.4,-2.8) M3(-1.6,-2.8) M7(1.6,-2.8) M8(2.4,-2.8) M9(3.2,-2.8) N1(-3.2,-3.6) N2(-2.4,-3.6) N3(-1.6,-3.6) N7(1.6,-3.6) N8(2.4,-3.6) N9(3.2,-3.6) P1(-3.2,-4.4) P2(-2.4,-4.4) P3(-1.6,-4.4) P7(1.6,-4.4) P8(2.4,-4.4) P9(3.2,-4.4) R1(-3.2,-5.2) R2(-2.4,-5.2) R3(-1.6,-5.2) R7(1.6,-5.2) R8(2.4,-5.2) R9(3.2,-5.2) T1(-3.2,-6) T2(-2.4,-6) T3(-1.6,-6) T7(1.6,-6) T8(2.4,-6) T9(3.2,-6)
  silkscreen extent -5.1,-7.05 4.55,7.05
BGA225C80P15X15_1300X1300X150N [mm]
  round 0.37 smd: A1(-5.6,5.6) A2(-4.8,5.6) A3(-4,5.6) A4(-3.2,5.6) A5(-2.4,5.6) A6(-1.6,5.6) A7(-0.8,5.6) A8(0,5.6) A9(0.8,5.6) A10(1.6,5.6) A11(2.4,5.6) A12(3.2,5.6) A13(4,5.6) A14(4.8,5.6) A15(5.6,5.6) B1(-5.6,4.8) B2(-4.8,4.8) B3(-4,4.8) B4(-3.2,4.8) B5(-2.4,4.8) B6(-1.6,4.8) B7(-0.8,4.8) B8(0,4.8) B9(0.8,4.8) B10(1.6,4.8) B11(2.4,4.8) B12(3.2,4.8) B13(4,4.8) B14(4.8,4.8) B15(5.6,4.8) C1(-5.6,4) C2(-4.8,4) C3(-4,4) C4(-3.2,4) C5(-2.4,4) C6(-1.6,4) C7(-0.8,4) C8(0,4) C9(0.8,4) C10(1.6,4) C11(2.4,4) C12(3.2,4) C13(4,4) C14(4.8,4) C15(5.6,4) D1(-5.6,3.2) D2(-4.8,3.2) D3(-4,3.2) D4(-3.2,3.2) D5(-2.4,3.2) D6(-1.6,3.2) D7(-0.8,3.2) D8(0,3.2) D9(0.8,3.2) D10(1.6,3.2) D11(2.4,3.2) D12(3.2,3.2) D13(4,3.2) D14(4.8,3.2) D15(5.6,3.2) E1(-5.6,2.4) E2(-4.8,2.4) E3(-4,2.4) E4(-3.2,2.4) E5(-2.4,2.4) E6(-1.6,2.4) E7(-0.8,2.4) E8(0,2.4) E9(0.8,2.4) E10(1.6,2.4) E11(2.4,2.4) E12(3.2,2.4) E13(4,2.4) E14(4.8,2.4) E15(5.6,2.4) F1(-5.6,1.6) F2(-4.8,1.6) F3(-4,1.6) F4(-3.2,1.6) F5(-2.4,1.6) F6(-1.6,1.6) F7(-0.8,1.6) F8(0,1.6) F9(0.8,1.6) F10(1.6,1.6) F11(2.4,1.6) F12(3.2,1.6) F13(4,1.6) F14(4.8,1.6) F15(5.6,1.6) G1(-5.6,0.8) G2(-4.8,0.8) G3(-4,0.8) G4(-3.2,0.8) G5(-2.4,0.8) G6(-1.6,0.8) G7(-0.8,0.8) G8(0,0.8) G9(0.8,0.8) G10(1.6,0.8) G11(2.4,0.8) G12(3.2,0.8) G13(4,0.8) G14(4.8,0.8) G15(5.6,0.8) H1(-5.6,0) H2(-4.8,0) H3(-4,0) H4(-3.2,0) H5(-2.4,0) H6(-1.6,0) H7(-0.8,0) H8(0,0) H9(0.8,0) H10(1.6,0) H11(2.4,0) H12(3.2,0) H13(4,0) H14(4.8,0) H15(5.6,0) J1(-5.6,-0.8) J2(-4.8,-0.8) J3(-4,-0.8) J4(-3.2,-0.8) J5(-2.4,-0.8) J6(-1.6,-0.8) J7(-0.8,-0.8) J8(0,-0.8) J9(0.8,-0.8) J10(1.6,-0.8) J11(2.4,-0.8) J12(3.2,-0.8) J13(4,-0.8) J14(4.8,-0.8) J15(5.6,-0.8) K1(-5.6,-1.6) K2(-4.8,-1.6) K3(-4,-1.6) K4(-3.2,-1.6) K5(-2.4,-1.6) K6(-1.6,-1.6) K7(-0.8,-1.6) K8(0,-1.6) K9(0.8,-1.6) K10(1.6,-1.6) K11(2.4,-1.6) K12(3.2,-1.6) K13(4,-1.6) K14(4.8,-1.6) K15(5.6,-1.6) L1(-5.6,-2.4) L2(-4.8,-2.4) L3(-4,-2.4) L4(-3.2,-2.4) L5(-2.4,-2.4) L6(-1.6,-2.4) L7(-0.8,-2.4) L8(0,-2.4) L9(0.8,-2.4) L10(1.6,-2.4) L11(2.4,-2.4) L12(3.2,-2.4) L13(4,-2.4) L14(4.8,-2.4) L15(5.6,-2.4) M1(-5.6,-3.2) M2(-4.8,-3.2) M3(-4,-3.2) M4(-3.2,-3.2) M5(-2.4,-3.2) M6(-1.6,-3.2) M7(-0.8,-3.2) M8(0,-3.2) M9(0.8,-3.2) M10(1.6,-3.2) M11(2.4,-3.2) M12(3.2,-3.2) M13(4,-3.2) M14(4.8,-3.2) M15(5.6,-3.2) N1(-5.6,-4) N2(-4.8,-4) N3(-4,-4) N4(-3.2,-4) N5(-2.4,-4) N6(-1.6,-4) N7(-0.8,-4) N8(0,-4) N9(0.8,-4) N10(1.6,-4) N11(2.4,-4) N12(3.2,-4) N13(4,-4) N14(4.8,-4) N15(5.6,-4) P1(-5.6,-4.8) P2(-4.8,-4.8) P3(-4,-4.8) P4(-3.2,-4.8) P5(-2.4,-4.8) P6(-1.6,-4.8) P7(-0.8,-4.8) P8(0,-4.8) P9(0.8,-4.8) P10(1.6,-4.8) P11(2.4,-4.8) P12(3.2,-4.8) P13(4,-4.8) P14(4.8,-4.8) P15(5.6,-4.8) R1(-5.6,-5.6) R2(-4.8,-5.6) R3(-4,-5.6) R4(-3.2,-5.6) R5(-2.4,-5.6) R6(-1.6,-5.6) R7(-0.8,-5.6) R8(0,-5.6) R9(0.8,-5.6) R10(1.6,-5.6) R11(2.4,-5.6) R12(3.2,-5.6) R13(4,-5.6) R14(4.8,-5.6) R15(5.6,-5.6)
  silkscreen extent -6.92,-6.5 6.5,6.5
C0805 [mm] "Chip Capacitor, Body 2.0x1.3mm, IPC High Density"
  rect 1.1x1.4 smd: 1(-0.75,0) 2(0.75,0)
  body extent -1.1,-0.72 1.1,0.72, height 1.4
CAPC3216X190N [mm]
  rect 1.44x1.82 smd: 1(-1.336,0) 2(1.336,0)
  silkscreen extent -0.29,-0.9 0.29,0.9, body extent -1.6,-0.8 1.6,0.8, height 1.9
CUI_UJ20-C-H-C-MSMT-TR [mm]
  rect 0.6x1.15 smd mask+0.05: A1_B12(-3.2,5.175) A4_B9(-2.4,5.175) A9_B4(2.4,5.175) A12_B1(3.2,5.175)
  rect 0.3x1.15 smd mask+0.05: A5(-1.25,5.175) A6(-0.25,5.175) A7(0.25,5.175) A8(1.25,5.175) B5(1.75,5.175) B6(0.75,5.175) B7(-0.75,5.175) B8(-1.75,5.175)
  oval 1x1.9 hole 0.6 slot 1.5 at 90 deg: SH1(-5.6,0) SH2(5.6,0)
  oval 1x1.6 hole 0.6 slot 1.2 at 90 deg: SH3(-5.6,4) SH4(5.6,4)
  Keep-Out Layer board cut-out: -4.769,4.616 -4.77,4.6 -4.77,-2.1 4.77,-2.1 4.77,4.6 4.769,4.616 4.768,4.632 4.764,4.647 4.76,4.662 4.755,4.677 4.748,4.691 4.74,4.705 4.731,4.718 4.721,4.731 4.711,4.742 4.699,4.753 4.686,4.763 4.673,4.771 4.659,4.779 4.645,4.785 4.63,4.791 4.615,4.795 4.599,4.798 4.583,4.8 4.568,4.8 4.552,4.799 4.536,4.797 4.521,4.794 4.506,4.789 4.491,4.784 4.477,4.777 4.463,4.769 4.45,4.76 4.438,4.75 4.426,4.738 4.416,4.729 4.408,4.721 4.399,4.713 4.39,4.705 4.38,4.697 4.371,4.69 4.361,4.683 4.351,4.676 4.341,4.669 4.331,4.663 4.32,4.657 4.309,4.651 4.299,4.646 4.288,4.641 4.277,4.636 4.266,4.631 4.254,4.627 4.243,4.623 4.231,4.619 4.22,4.616 4.208,4.613 4.196,4.61 4.184,4.608 4.173,4.606 4.161,4.604 4.149,4.603 4.137,4.601 4.125,4.601 4.113,4.6 4.1,4.6 -4.1,4.6 -4.113,4.6 -4.125,4.601 -4.137,4.601 -4.149,4.603 -4.161,4.604 -4.173,4.606 -4.184,4.608 -4.196,4.61 -4.208,4.613 -4.22,4.616 -4.231,4.619 -4.243,4.623 -4.254,4.627 -4.266,4.631 -4.277,4.636 -4.288,4.641 -4.299,4.646 -4.309,4.651 -4.32,4.657 -4.331,4.663 -4.341,4.669 -4.351,4.676 -4.361,4.683 -4.371,4.69 -4.38,4.697 -4.39,4.705 -4.399,4.713 -4.408,4.721 -4.416,4.729 -4.426,4.738 -4.438,4.75 -4.45,4.76 -4.463,4.769 -4.477,4.777 -4.491,4.784 -4.506,4.789 -4.521,4.794 -4.536,4.797 -4.552,4.799 -4.568,4.8 -4.583,4.8 -4.599,4.798 -4.615,4.795 -4.63,4.791 -4.645,4.785 -4.659,4.779 -4.673,4.771 -4.686,4.763 -4.699,4.753 -4.711,4.742 -4.721,4.731 -4.731,4.718 -4.74,4.705 -4.748,4.691 -4.755,4.677 -4.76,4.662 -4.764,4.647 -4.768,4.632
EC_LGA-10_MNP [mil]
  rect 18x16 smd paste+0 mask+0: 1(-43.5,12.8) 2(-43.5,-12.8) 6(43.5,-12.8) 7(43.5,12.8)
  rect 16x18 smd paste+0 mask+0: 3(-25.59,-43.5) 4(0,-43.5) 5(25.59,-43.5) 8(25.59,43.5) 9(0,43.5) 10(-25.59,43.5)
  silkscreen extent -66,-66 66,72
HDR1X7 [mm] "Connector; Header; 7 Position"
  rect 1.5x1.5 hole 0.9: 1(0,0)
  round 1.5 hole 0.9: 2(2.54,0) 3(5.08,0) 4(7.62,0) 5(10.16,0) 6(12.7,0) 7(15.24,0)
  silkscreen extent -1.27,-1.27 16.51,1.27
HDR2X7H [mm] "Connector; Header; 7x2 Position; Right Angle"
  rect 1.5x1.5 hole 0.9: 1(0,0)
  round 1.5 hole 0.9: 2(0,2.54) 3(2.54,0) 4(2.54,2.54) 5(5.08,0) 6(5.08,2.54) 7(7.62,0) 8(7.62,2.54) 9(10.16,0) 10(10.16,2.54) 11(12.7,0) 12(12.7,2.54) 13(15.24,0) 14(15.24,2.54)
  silkscreen extent -1.27,-6.35 16.51,-1.27
IC_TUSB320IRWBR [mm]
  rrect50% 0.7x0.2 smd paste-1 mask+0: 1(-0.65,0.2) 2(-0.65,-0.2) 7(0.65,-0.2) 8(0.65,0.2)
  rrect50% 0.2x0.5 smd mask+0: 3(-0.6,-0.75) 4(-0.2,-0.75) 5(0.2,-0.75) 6(0.6,-0.75) 9(0.6,0.75) 10(0.2,0.75) 11(-0.2,0.75) 12(-0.6,0.75)
  silkscreen extent -1.6,0.1 -1.4,0.3, body extent -0.8,-0.8 0.8,0.8, height 0.4
IND_DLW21H_0805_MUR [mm]
  rect 0.755x0.349 smd paste+0 mask+0: 1(-1.027,-0.5) 2(1.027,-0.5) 3(1.027,0.5) 4(-1.027,0.5)
  silkscreen extent -0.35,-0.83 0.35,0.83, body extent -1.1,-0.7 1.1,0.7, height 1
LED_LTST-S220TBKT [mm]
  rect 1.5x1 smd: A(1.25,0) C(-1.25,0)
  silkscreen extent -2.6,-0.75 0.19,0.25
LGA7x7x2_MNP [mil]
  rect 39x14 smd paste+0 mask+0: 1(-117.5,63.98) 2(-117.5,38.39) 3(-117.5,12.8) 4(-117.5,-12.8) 5(-117.5,-38.39) 6(-117.5,-63.98) 17(117.5,-63.98) 18(117.5,-38.39) 19(117.5,-12.8) 20(117.5,12.8) 21(117.5,38.39) 22(117.5,63.98)
  rect 14x39 smd paste+0 mask+0: 7(-115.16,-117.5) 8(-89.57,-117.5) 9(-63.98,-117.5) 10(-38.39,-117.5) 11(-12.8,-117.5) 12(12.8,-117.5) 13(38.39,-117.5) 14(63.98,-117.5) 15(89.57,-117.5) 16(115.16,-117.5) 23(115.16,117.5) 24(89.57,117.5) 25(63.98,117.5) 26(38.39,117.5) 27(12.8,117.5) 28(-12.8,117.5) 29(-38.39,117.5) 30(-63.98,117.5) 31(-89.57,117.5) 32(-115.16,117.5)
  rect 138x138 smd paste-69 mask+0: 33(0,0)
  silkscreen extent -145,-157 157,157, body extent -140,-140 140,140, height 83
MHDR2X7 [mm] "Connector; Header; 7x2 Position"
  rect 1x1 hole 0.6: 1(0,0)
  round 1 hole 0.6: 2(0,1.27) 3(1.27,0) 4(1.27,1.27) 5(2.54,0) 6(2.54,1.27) 7(3.81,0) 8(3.81,1.27) 9(5.08,0) 10(5.08,1.27) 11(6.35,0) 12(6.35,1.27) 13(7.62,0) 14(7.62,1.27)
  silkscreen extent -0.9,-0.9 8.52,2.17
OSC_SIT1602BI-11-18E-24.000000G [mm]
  rect 1x1.1 smd: 1(-0.75,0.95) 2(-0.75,-0.95) 3(0.75,-0.95) 4(0.75,0.95)
  silkscreen extent -1.97,-0.08 1,1.1
QFN50P400X400X80-25N [mm]
  rrect25% 0.84x0.26 smd: 1(-1.935,1.25) 2(-1.935,0.75) 3(-1.935,0.25) 4(-1.935,-0.25) 5(-1.935,-0.75) 6(-1.935,-1.25) 13(1.935,-1.25) 14(1.935,-0.75) 15(1.935,-0.25) 16(1.935,0.25) 17(1.935,0.75) 18(1.935,1.25)
  rrect25% 0.26x0.84 smd: 7(-1.25,-1.935) 8(-0.75,-1.935) 9(-0.25,-1.935) 10(0.25,-1.935) 11(0.75,-1.935) 12(1.25,-1.935) 19(1.25,1.935) 20(0.75,1.935) 21(0.25,1.935) 22(-0.25,1.935) 23(-0.75,1.935) 24(-1.25,1.935)
  rect 2.45x2.45 smd paste-0.455: 25(0,0)
  silkscreen extent -3.07,-2 2,2
QFN50P500X500X100-33N [mm]
  rrect7% 0.86x0.26 smd: 1(-2.435,1.75) 2(-2.435,1.25) 3(-2.435,0.75) 4(-2.435,0.25) 5(-2.435,-0.25) 6(-2.435,-0.75) 7(-2.435,-1.25) 8(-2.435,-1.75) 17(2.435,-1.75) 18(2.435,-1.25) 19(2.435,-0.75) 20(2.435,-0.25) 21(2.435,0.25) 22(2.435,0.75) 23(2.435,1.25) 24(2.435,1.75)
  rrect7% 0.26x0.86 smd: 9(-1.75,-2.435) 10(-1.25,-2.435) 11(-0.75,-2.435) 12(-0.25,-2.435) 13(0.25,-2.435) 14(0.75,-2.435) 15(1.25,-2.435) 16(1.75,-2.435) 25(1.75,2.435) 26(1.25,2.435) 27(0.75,2.435) 28(0.25,2.435) 29(-0.25,2.435) 30(-0.75,2.435) 31(-1.25,2.435) 32(-1.75,2.435)
  rect 3.3x3.3 smd paste-0.606: 33(0,0)
  silkscreen extent -3.96,1.65 -3.77,1.85, body extent -2.5,-2.5 2.5,2.5, height 1
RESC3216X125N [mm]
  rrect25% 1.2x1.82 smd: 1(-1.505,0) 2(1.505,0)
  silkscreen extent -1.63,-1.09 1.63,1.09
SAMTEC_MTMM-107-03-G-D-190 [mm]
  rect 1.24x1.24 hole 0.89: 01(-6,-1)
  round 1.24 hole 0.89: 02(-6,1) 03(-4,-1) 04(-4,1) 05(-2,-1) 06(-2,1) 07(0,-1) 08(0,1) 09(2,-1) 10(2,1) 11(4,-1) 12(4,1) 13(6,-1) 14(6,1)
  silkscreen extent -8.1,-2.2 7.2,2.2
SOIC127P600X175-8N [mm]
  rrect25% 1.75x0.59 smd: 1(-2.585,1.905) 2(-2.585,0.635) 3(-2.585,-0.635) 4(-2.585,-1.905) 5(2.585,-1.905) 6(2.585,-0.635) 7(2.585,0.635) 8(2.585,1.905)
  silkscreen extent -4.2,-2.52 1.95,2.52, body extent -3,-2.45 3,2.45, height 1.75
SON50P300X300X80-9N [mm]
  rrect25% 0.86x0.27 smd: 1(-1.435,0.75) 2(-1.435,0.25) 3(-1.435,-0.25) 4(-1.435,-0.75) 5(1.435,-0.75) 6(1.435,-0.25) 7(1.435,0.25) 8(1.435,0.75)
  rect 1.6x2.44 smd paste-2: 9(0,0)
  silkscreen extent -2.59,-1.54 1.5,1.54, body extent -1.5,-1.5 1.5,1.5, height 0.75
SON127P600X800X80-9N [mm]
  rrect70% 0.94x0.44 smd: 1(-3.895,1.905) 2(-3.895,0.635) 3(-3.895,-0.635) 4(-3.895,-1.905) 5(3.895,-1.905) 6(3.895,-0.635) 7(3.895,0.635) 8(3.895,1.905)
  rect 3.4x4.3 smd paste-3: 9(0,0)
  silkscreen extent -5.46,-3 4,3, body extent -4,-3 4,3, height 0.8
SOT25_DIO [mm]
  rect 1.006x0.5 smd paste+0 mask+0: 1(-1.353,0.95) 2(-1.353,0) 3(-1.353,-0.95) 4(1.353,-0.95) 5(1.353,0.95)
  silkscreen extent -0.98,-1.68 0.98,1.68, body extent -1.5,-1.55 1.5,1.55, height 1.45
SOT65P212X110-5N [mm]
  rect 1.05x0.4 smd: 1(-0.95,0.65) 2(-0.95,0) 3(-0.95,-0.65) 4(0.95,-0.65) 5(0.95,0.65)
  silkscreen extent -1.48,-1.02 0.08,1.1
SOT143 [mm]
  rrect15% 0.99x1.3 smd: 1(-0.76,-1.025)
  rrect15% 0.59x1.3 smd: 2(0.96,-1.025) 3(0.96,1.025) 4(-0.96,1.025)
  silkscreen extent -1.52,-2.2 1.52,0.7, body extent -1.18,-1.46 1.18,1.46, height 1.22
SOT-23-3_1P4X3P040_ONS [mil]
  rect 22x52 smd paste+0 mask+0: 1(-37.5,-40) 2(37.5,-40) 3(0,40)
  silkscreen extent -65,-99 65,33, body extent -60,-52 60,52, height 44
VREG_V62/16624-01YE [mm]
  rrect25% 0.6x0.24 smd mask+0: 1(-1.4,1) 2(-1.4,0.5) 3(-1.4,0) 4(-1.4,-0.5) 5(-1.4,-1) 6(1.4,-1) 7(1.4,-0.5) 8(1.4,0) 9(1.4,0.5) 10(1.4,1)
  rrect5% 1.65x2.4 smd paste-2 mask+0: 11(0,0)
  round 0.3 hole 0.2 mask+0: 12(0,-0.95) 13(-0.575,0) 14(0.575,0) 15(0,0.95)
  Top Layer region: 0.375,1.2 0.825,1.2 0.825,-1.2 0.375,-1.2 0.375,-1.7 0.125,-1.7 0.125,-1.2 -0.125,-1.2 -0.125,-1.7 -0.375,-1.7 -0.375,-1.2 -0.825,-1.2 -0.825,1.2 -0.375,1.2 -0.375,1.7 -0.125,1.7 -0.125,1.2 0.125,1.2 0.125,1.7 0.375,1.7
  silkscreen extent -2.49,-1.5 1.5,1.5
WE-PD_7332R [mm] "SMT Shielded Power Inductor, 2-leads, body 7.3x7.3mm"
  rect 1.7x2 smd: 1(0,3) 2(0,-3)
  Top Layer keep-out region: 3.65,-3.65 1.05,-3.65 1.05,-1.8 -1.05,-1.8 -1.05,-3.65 -3.65,-3.65 -3.65,3.65 -1.05,3.65 -1.05,1.8 1.05,1.8 1.05,3.65 3.65,3.65
  silkscreen extent -3.8,-3.8 3.8,4.62, body extent -3.65,-3.65 3.65,3.65, height 3.22
WQFN_3QRVCRQ1_TEX [mil]
  rect 30x8 smd paste+0 mask+0: 1(-58,49.23) 2(-58,29.54) 3(-58,9.85) 4(-58,-9.85) 5(-58,-29.53) 6(-58,-49.22) 11(58,-49.22) 12(58,-29.53) 13(58,-9.85) 14(58,9.85) 15(58,29.54) 16(58,49.23)
  rect 8x30 smd paste+0 mask+0: 7(-29.53,-77.5) 8(-9.84,-77.5) 9(9.84,-77.5) 10(29.53,-77.5) 17(29.53,77.5) 18(9.84,77.5) 19(-9.84,77.5) 20(-29.53,77.5)
  rect 67x106 smd paste-33.5 mask+0: 21(0,0)
  silkscreen extent -66,-112 66,112, body extent -61,-81 61,81, height 32
XFMR_TCM1-63AX+ [mil]
  rect 30x65 smd: 1(-50,62.5) 2(0,62.5) 3(50,62.5) 4(50,-62.5) 5(0,-62.5) 6(-50,-62.5)
  silkscreen extent -54,106 -46,114
XTAL_ASDMB-33.000MHZ-LY-T [mm]
  rect 0.85x0.65 smd: 1(-0.775,0.825) 2(-0.775,-0.825) 3(0.775,-0.825) 4(0.775,0.825)
  silkscreen extent -1.85,-0.15 1,0.92